# Allegro board 14109-MN34220_LV_REFB VER_A.brd
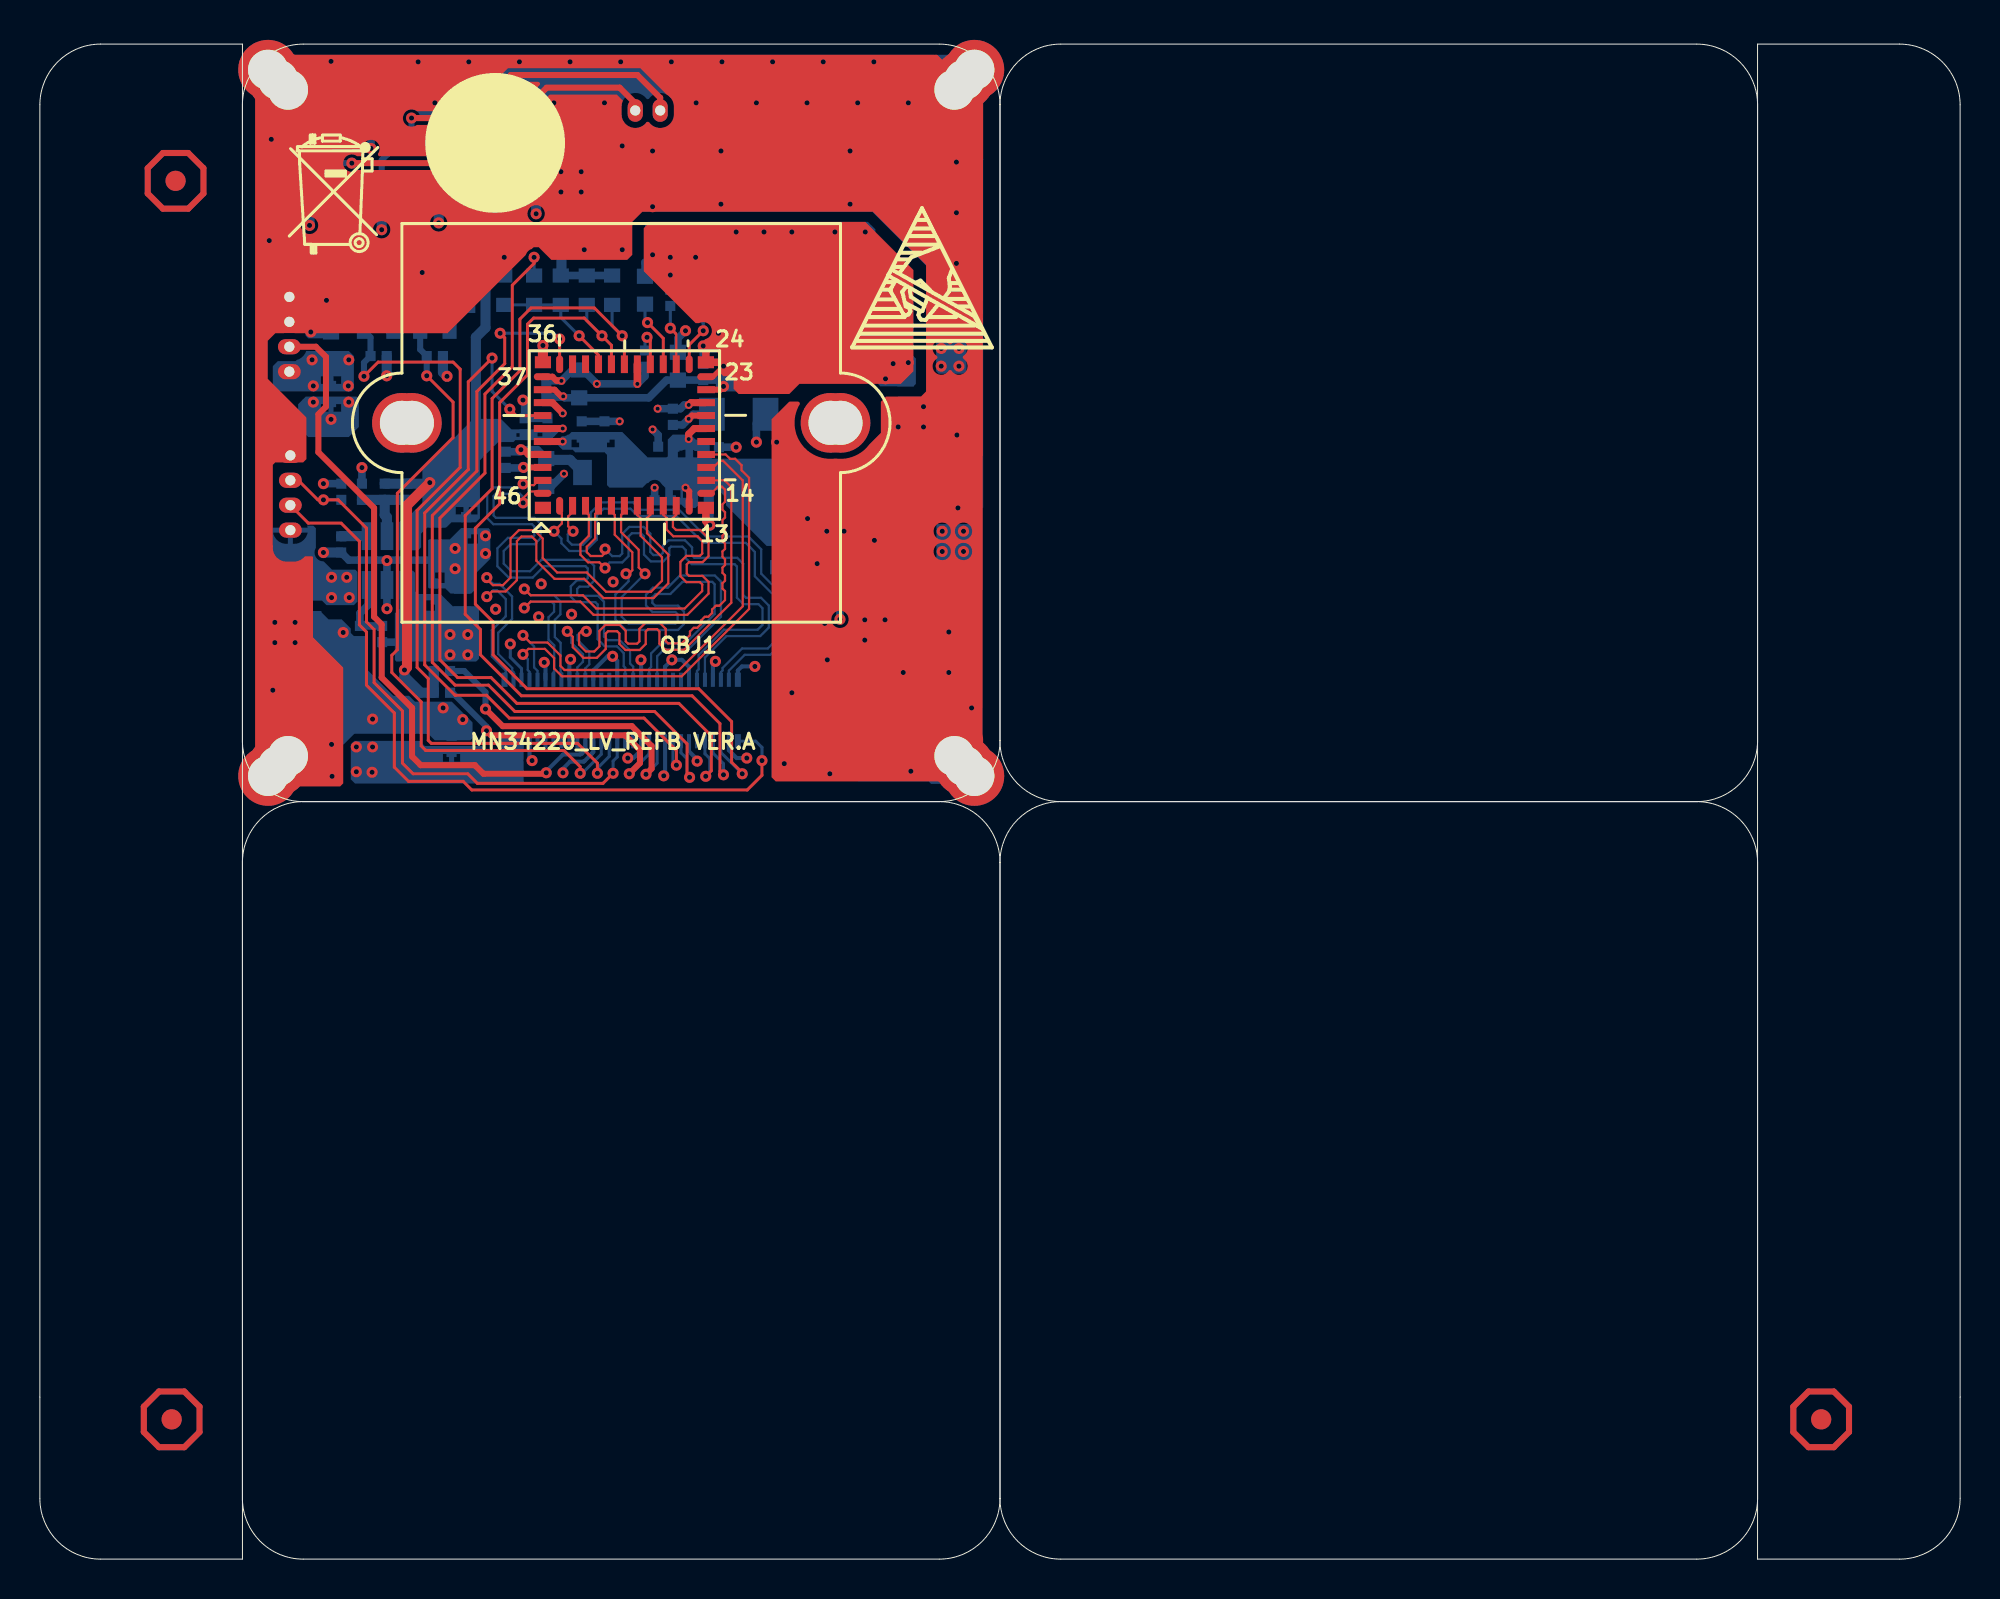
[diagram p0: board, top side]
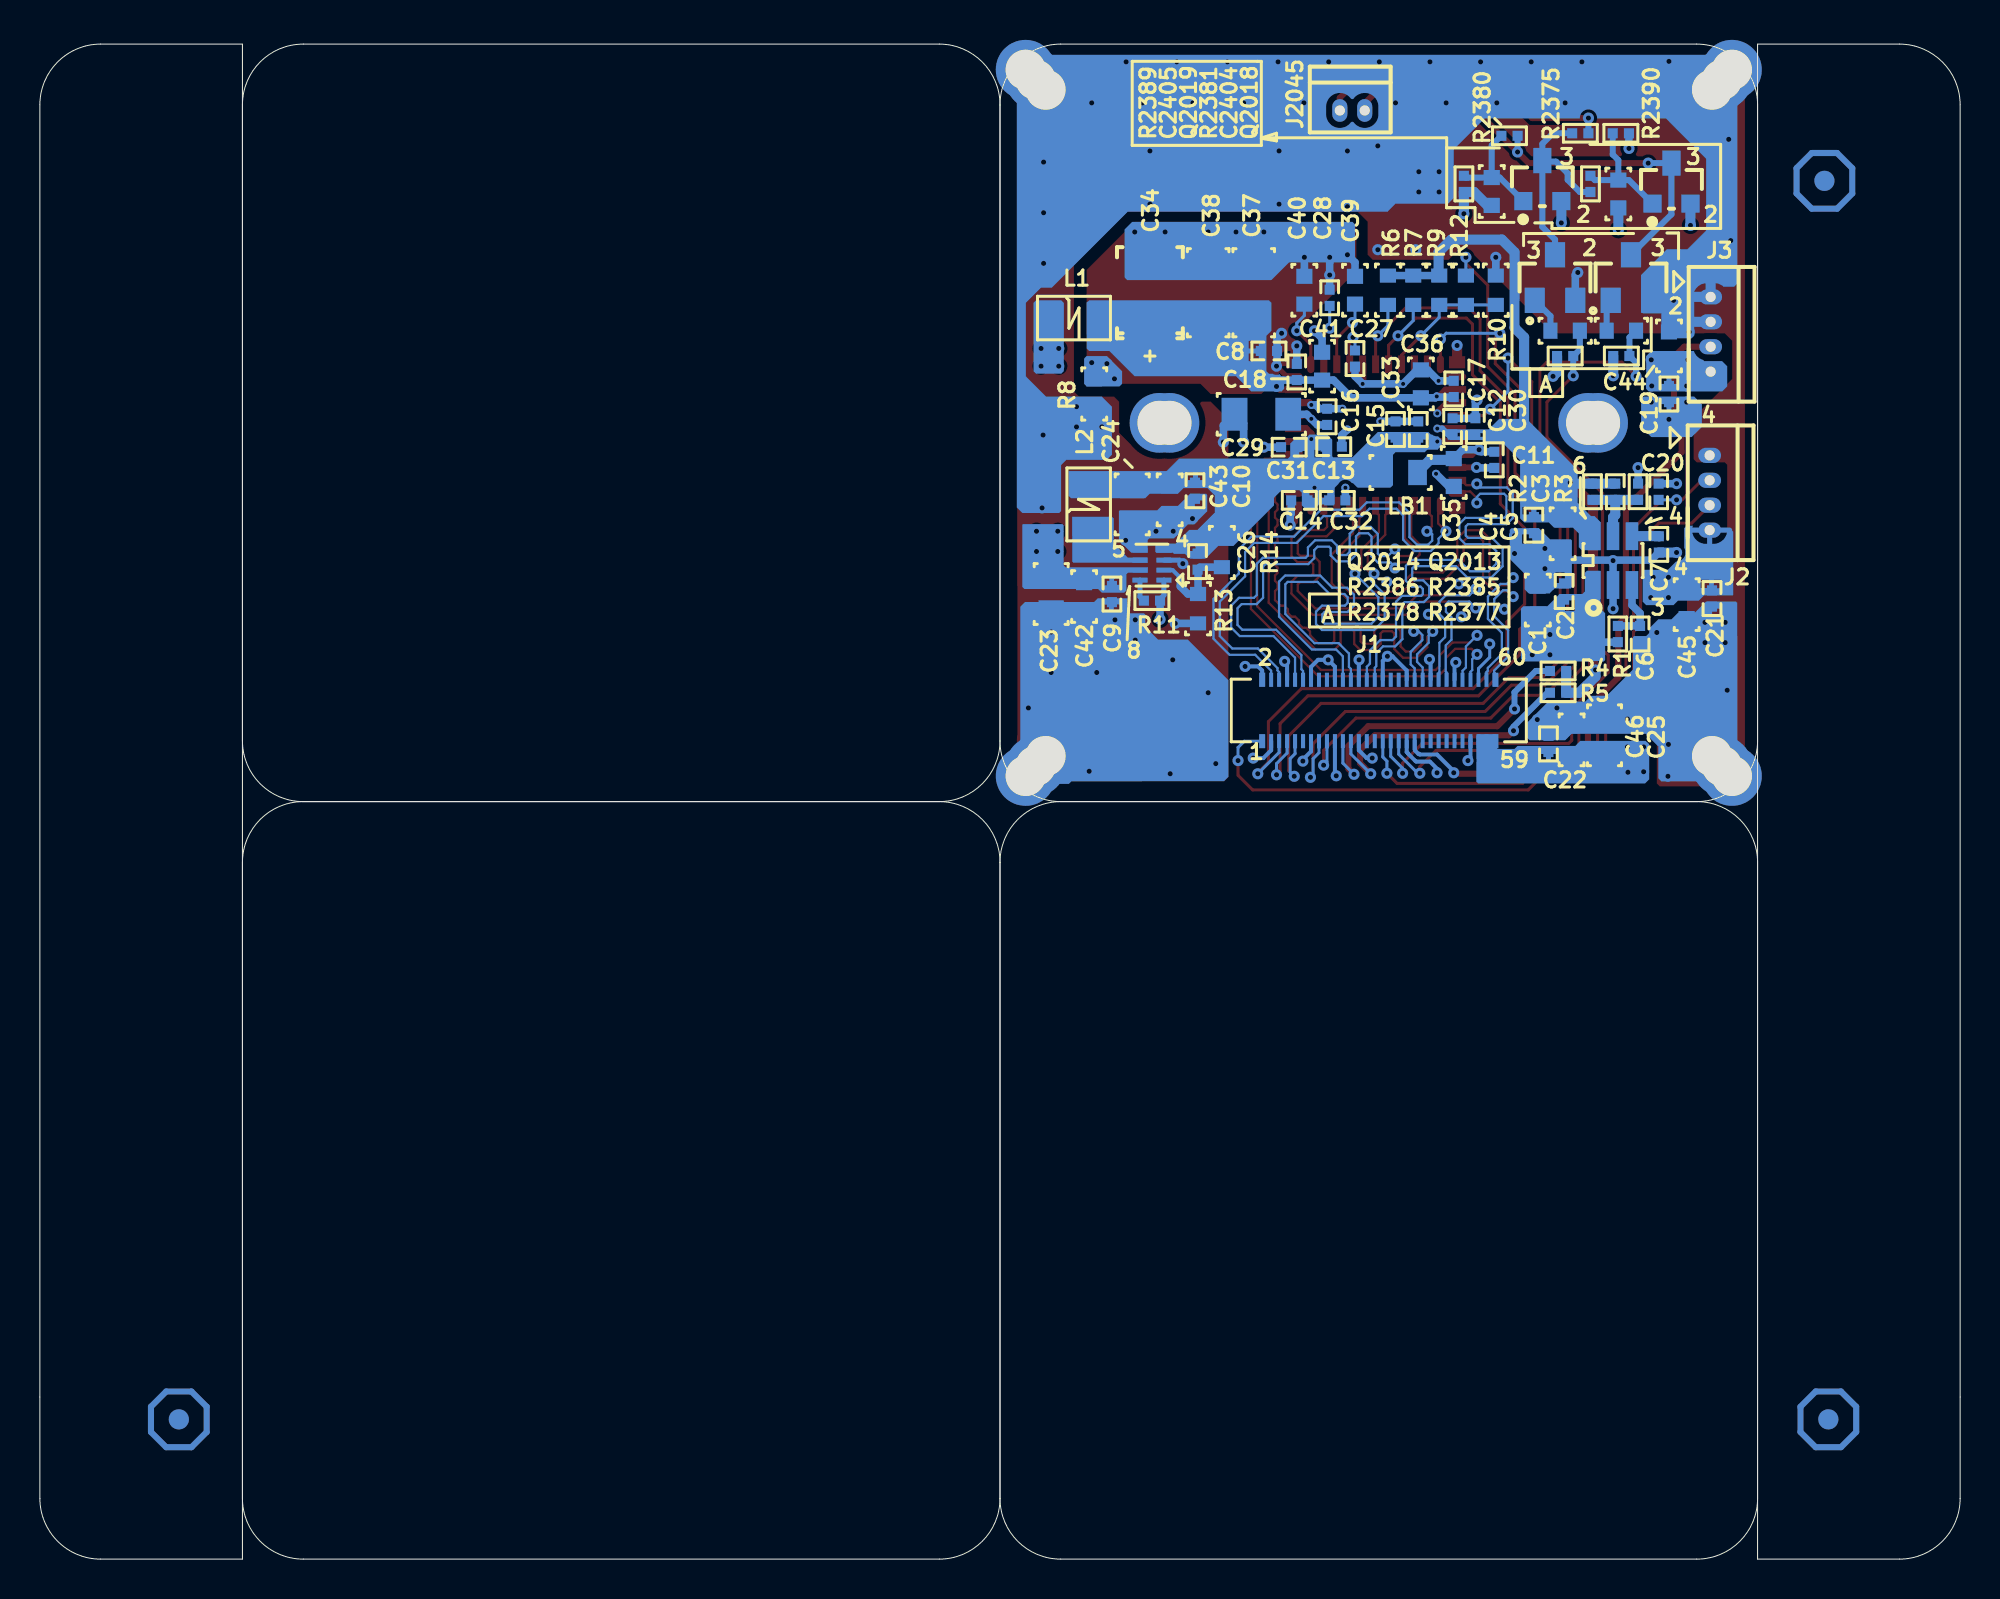
[diagram p1: board, bottom side, seen from below]

Outline 96.32 x 76 mm; copper layers: TOP, GND02, POWER03, BOTTOM. Coordinates in mm from the lower left corner of the outline.
Outline path: 13.21,38 arc(11.05,37.11) 10.16,34.95 10.16,3.05 arc(11.05,0.89) 13.21,0 45.11,0 arc(47.27,0.89) 48.16,3.05 ; 13.21,38 arc(11.05,38.89) 10.16,41.05 10.16,72.95 arc(11.05,75.11) 13.21,76 45.11,76 arc(47.27,75.11) 48.16,72.95 ; 13.21,38 45.11,38 ; 13.21,38 45.11,38 ; 45.11,38 arc(47.27,37.11) 48.16,34.95 ; 45.11,38 arc(47.27,38.89) 48.16,41.05 ; 48.16,72.95 48.16,41.05 ; 48.16,72.95 arc(49.05,75.11) 51.21,76 83.11,76 arc(85.27,75.11) 86.16,72.95 86.16,41.05 arc(85.27,38.89) 83.11,38 ; 48.16,72.95 48.16,41.05 ; 48.16,34.95 48.16,3.05 ; 48.16,34.95 arc(49.05,37.11) 51.21,38 ; 48.16,34.95 48.16,3.05 ; 48.16,41.05 arc(49.05,38.89) 51.21,38 ; 48.16,3.05 arc(49.05,0.89) 51.21,0 83.11,0 arc(85.27,0.89) 86.16,3.05 86.16,34.95 arc(85.27,37.11) 83.11,38 ; 51.21,38 83.11,38 ; 51.21,38 83.11,38 ; 0,72.95 arc(0.89,75.11) 3.05,76 10.16,76 10.16,0 3.05,0 arc(0.89,0.89) 0,3.05 0,72.95 ; 86.16,76 93.27,76 arc(95.43,75.11) 96.32,72.95 96.32,3.05 arc(95.43,0.89) 93.27,0 86.16,0 86.16,76

## Design rules (mm)
net group DIFFPAIR0: nets SENSOR_SDODA1M SENSOR_SDODA1P
net group DIFFPAIR1: nets SENSOR_SDODA0M SENSOR_SDODA0P
net group DIFFPAIR2: nets SENSOR_SDOCAM SENSOR_SDOCAP
net group DIFFPAIR3: nets SENSOR_SDODB0M SENSOR_SDODB0P
net group DIFFPAIR4: nets SENSOR_SDODB1M SENSOR_SDODB1P
net group DIFFPAIR5: nets SENSOR_SDODB2M SENSOR_SDODB2P
net group DIFFPAIR6: nets SENSOR_SDODCBM SENSOR_SDODCBP
net group DIFFPAIR7: nets SENSOR_SDODA2M SENSOR_SDODA2P

## Placement (name value [footprint] x y rotation side)
C1  -  [SC0603]  21.18 48.11 90 bottom
C2  -  [SC0402]  19.86 48.54 90 bottom
C3  -  [SC0402]  17.3 53.54 270 bottom
C4  -  [SC0402]  21.38 51.87 270 bottom
C5  -  [SC0603]  19.94 51.44 270 bottom
C6  -  [SC0402]  16.05 46.41 270 bottom
C7  -  [SC0402]  15.11 50.9 270 bottom
C8  -  [SC0402]  34.67 60.61 180 bottom
C9  -  [SC0402]  42.55 48.41 270 bottom
C10  -  [SC0402]  38.38 53.6 270 bottom
C11  -  [SC0402]  23.37 55.14 270 bottom
C12  -  [SC0402]  25.46 56.82 90 bottom
C13  -  [SC0402]  31.42 55.81 180 bottom
C14  -  [SC0402]  33.15 53.11 0 bottom
C15  -  [SC0402]  28.32 56.67 90 bottom
C16  -  [SC0402]  31.75 57.3 90 bottom
C17  -  [SC0402]  25.4 58.7 90 bottom
C18  -  [SC0402]  33.27 59.55 90 bottom
C19  -  [SC0402]  14.61 58.45 270 bottom
C20  -  [SC0402]  15.12 53.54 90 bottom
C21  -  [SC0402]  12.45 48.19 270 bottom
C22  -  [SC0402]  20.65 40.9 90 bottom
C23  -  [SC0805]  45.59 48.41 270 bottom
C24  -  [SC0805]  41.53 52.91 270 bottom
C25  -  [SC0805]  17.84 41.33 90 bottom
C26  -  [SC0402]  38.25 50.04 270 bottom
C27  -  [SC0402]  30.35 60.22 270 bottom
C28  -  [SC0402]  31.62 63.27 90 bottom
C29  -  [SC1206]  35.05 57.43 0 bottom
C30  -  [SC0402]  24.32 56.82 90 bottom
C31  -  [SC0402]  33.66 55.78 0 bottom
C32  -  [SC0402]  31.24 53.11 180 bottom
C33  -  [SC0402]  27.18 56.67 90 bottom
C34  -  [STC3528]  40.64 63.53 90 bottom
C35  -  [SC0603]  25.4 54.51 270 bottom
C36  -  [SC0603]  27.05 58.95 90 bottom
C37  -  [SC1206]  35.43 63.53 90 bottom
C38  -  [SC1206]  37.72 63.53 90 bottom
C39  -  [SC0603]  30.35 63.65 90 bottom
C40  -  [SC0603]  32.89 63.65 90 bottom
C41  -  [SC0603]  32 59.84 90 bottom
C42  -  [SC0603]  43.94 48.29 270 bottom
C43  -  [SC0603]  39.65 53.14 270 bottom
C44  -  [SC0603]  14.61 60.86 90 bottom
C45  -  [SC0603]  13.72 47.88 270 bottom
C46  -  [SC0603]  19.49 41.1 90 bottom
C2404  -  [SC0603]  17.14 68.48 90 bottom
C2405  -  [SC0603]  23.5 68.61 90 bottom
J1  -  [SED60-16F-A]  29.16 42.57 180 bottom
J2  -  [WBC0104-49T]  12.56 55.37 270 bottom
J3  -  [WBC0104-49T]  12.51 63.32 270 bottom
J2045  -  [SIP-2P-20]  31.11 72.67 180 bottom
L1  -  [HSL1007]  44.45 62.26 180 bottom
L2  -  [HSL1007]  43.71 52.91 90 bottom
LB1  -  [SL0805]  28.07 54.51 0 bottom
M1  -  [HOLE_3]  11.45 39.29 90 top
M2  -  [HOLE_3]  46.87 39.29 180 top
M3  -  [HOLE_3]  46.87 74.71 270 top
M4  -  [HOLE_3]  11.45 74.71 0 top
NOREF  -  [unnamed]  6.61 7.01 270 top
NOREF#2  -  [#2]  0 72.95 0 top
NOREF#3  -  [#2]  17.27 68.59 0 top
NOREF#4  -  [#2]  142.43 104.27 0 top
NOREF#5  -  [unnamed]  6.81 69.14 270 top
NOREF#6  -  [#2]  -173.94 -125.63 0 top
NOREF#7  -  [#2]  27.91 71.02 0 top
NOREF#8  -  [#2]  10.16 72.95 0 top
NOREF#9  -  [#2]  147.78 92.94 0 top
NOREF#10  -  [#2]  0 72.95 0 top
NOREF#11  -  [#2]  13.21 38 90 top
NOREF#12  -  [#2]  41.5 143.11 0 top
NOREF#13  -  [#2]  194.61 149.83 0 top
NOREF#14  -  [#2]  43.56 63.78 0 top
NOREF#15  -  [unnamed]  89.35 7.01 270 top
NOREF#16  -  [#2]  3.05 0 90 top
NOREF#17  -  [unnamed]  6.81 69.14 90 bottom
NOREF#18  -  [unnamed]  89.35 7.01 90 bottom
NOREF#19  -  [unnamed]  6.61 7.01 90 bottom
OBJ1  -  [LENS_SOCKET]  29.16 57 0 top
Q2013  -  [SOT23]  16.51 64.29 180 bottom
Q2014  -  [SOT23]  20.32 64.29 180 bottom
Q2018  -  [HSOT23]  14.48 68.99 180 bottom
Q2019  -  [HSOT23]  20.96 69.11 180 bottom
R1  -  [SR0402]  17.17 46.41 90 bottom
R2  -  [SR0402]  18.44 53.54 270 bottom
R3  -  [SR0402]  16.15 53.54 90 bottom
R4  -  [SR0402]  20.17 44.55 180 bottom
R5  -  [SR0402]  20.17 43.46 180 bottom
R6  -  [SR0603]  28.7 63.65 270 bottom
R7  -  [SR0603]  27.43 63.65 270 bottom
R8  -  [SR0603]  43.43 58.45 90 bottom
R9  -  [SR0603]  26.13 63.65 270 bottom
R10  -  [SR0603]  23.29 63.65 90 bottom
R11  -  [SR0402]  40.54 48.08 0 bottom
R12  -  [SR0603]  24.79 63.65 90 bottom
R13  -  [SR0603]  38.23 47.68 270 bottom
R14  -  [SR0603]  37.03 50.5 270 bottom
R2375  -  [SR0402]  19.05 71.53 180 bottom
R2377  -  [SR0402]  16.99 60.35 0 bottom
R2378  -  [SR0402]  19.81 60.35 0 bottom
R2380  -  [SR0402]  22.61 71.4 180 bottom
R2381  -  [SR0402]  18.54 68.99 270 bottom
R2385  -  [SR0603]  16.99 61.62 0 bottom
R2386  -  [SR0603]  19.81 61.62 0 bottom
R2389  -  [SR0402]  24.89 68.99 90 bottom
R2390  -  [SR0402]  17.02 71.53 0 bottom
U1  -  [SOT23-6B]  17.41 50.09 180 bottom
U2  -  [WQFN46-065-9_4X8_3MM]  29.32 56.39 0 top
U3  VALUE  [QFN8-050-02015L]  40.54 49.86 90 bottom

## Library data of the parts
C1 C5 C35 C36 C39-C46 C2404 C2405 = SC0603
C2-C4 C6-C22 C26-C28 C30-C33 = SC0402
C23-C25 = SC0805
C29 C37 C38 = SC1206
C34 = STC3528
J1 = SED60-16F-A
J2 J3 = WBC0104-49T
J2045 = SIP-2P-20
L1 L2 = HSL1007
LB1 = SL0805
M1-M4 = HOLE_3
OBJ1 = LENS_SOCKET
Q2013 Q2014 = SOT23
Q2018 Q2019 = HSOT23
R1-R5 R11 R2375 R2377 R2378 R2380 R2381 R2389 R2390 = SR0402
R6-R10 R12-R14 R2385 R2386 = SR0603
U1 = SOT23-6B
U2 = WQFN46-065-9_4X8_3MM
U3 = QFN8-050-02015L

## Footprints (pads in the part's own frame, mm; a bottom-side part is the same pattern mirrored in y, then rotated)
HOLE_3
  round 2.997 hole 2.007: 1(0,0) 2(0.5,-0.5) 3(1,-1)
HSL1007
  rect 0.914x1.626 smd: 1(-1.1,0) 2(1.1,0)
HSOT23
  rect 0.914x0.914 smd: 1(-0.953,-0.991) 2(0.953,-0.991)
  rect 0.914x1.27 smd: 3(0,1.041)
LENS_SOCKET
  round 2.997 hole 2.21: 1(11,0) 2(-11,0) 3(10.5,0) 4(-10.5,0)
QFN8-050-02015L
  rect 0.254x0.762 smd: 1(-0.75,-0.6) 2(-0.25,-0.6) 3(0.25,-0.6) 4(0.75,-0.6) 5(0.75,0.6) 6(0.25,0.6) 7(-0.25,0.6) 8(-0.75,0.6)
SC0402
  rect 0.508x0.508 smd: 1(-0.406,0) 2(0.406,0)
SC0603
  rect 0.762x0.813 smd: 1(-0.699,0) 2(0.699,0)
SC0805
  rect 0.991x1.27 smd: 1(-0.813,0) 2(0.813,0)
SC1206
  rect 1.295x1.651 smd: 1(-1.346,0) 2(1.346,0)
SED60-16F-A
  rect 0.305x0.711 smd: 1(-5.851,-1.54) 2(-5.851,1.54) 59(5.851,-1.54) 60(5.851,1.54)
  rect 0.203x0.711 smd: 3(-5.4,-1.54) 4(-5.4,1.54) 5(-5,-1.54) 6(-5,1.54) 7(-4.6,-1.54) 8(-4.6,1.54) 9(-4.2,-1.54) 10(-4.2,1.54) 11(-3.8,-1.54) 12(-3.8,1.54) 13(-3.4,-1.54) 14(-3.4,1.54) 15(-3,-1.54) 16(-3,1.54) 17(-2.6,-1.54) 18(-2.6,1.54) 19(-2.2,-1.54) 20(-2.2,1.54) 21(-1.8,-1.54) 22(-1.8,1.54) 23(-1.4,-1.54) 24(-1.4,1.54) 25(-1,-1.54) 26(-1,1.54) 27(-0.6,-1.54) 28(-0.6,1.54) 29(-0.2,-1.54) 30(-0.2,1.54) 31(0.2,-1.54) 32(0.2,1.54) 33(0.6,-1.54) 34(0.6,1.54) 35(1,-1.54) 36(1,1.54) 37(1.4,-1.54) 38(1.4,1.54) 39(1.8,-1.54) 40(1.8,1.54) 41(2.2,-1.54) 42(2.2,1.54) 43(2.6,-1.54) 44(2.6,1.54) 45(3,-1.54) 46(3,1.54) 47(3.4,-1.54) 48(3.4,1.54) 49(3.8,-1.54) 50(3.8,1.54) 51(4.2,-1.54) 52(4.2,1.54) 53(4.6,-1.54) 54(4.6,1.54) 55(5,-1.54) 56(5,1.54) 57(5.4,-1.54) 58(5.4,1.54)
SIP-2P-20
  oval 0.762x1.143 hole 0.508: 1(0,0) 2(1.25,0)
SL0805
  rect 0.94x1.27 smd: 1(-0.851,0) 2(0.851,0)
SOT23
  rect 1.016x1.27 smd: 1(-1.016,-1.143) 2(1.016,-1.143) 3(0,1.143)
SOT23-6B
  rect 0.635x1.397 smd: 1(-0.95,-1.225) 2(0,-1.225) 3(0.95,-1.225) 4(0.95,1.225) 5(0,1.225) 6(-0.95,1.225)
SR0402
  rect 0.508x0.508 smd: 1(-0.406,0) 2(0.406,0)
SR0603
  rect 0.711x0.813 smd: 1(-0.737,0) 2(0.737,0)
STC3528
  rect 1.727x2.286 smd: 1(-1.499,0) 2(1.499,0)
unnamed
  round 1.016 smd: 1(0,0)
WBC0104-49T
  oval 0.762x1.143 hole 0.508: 1(0,0) 2(1.25,0) 3(2.5,0) 4(3.75,0)
WQFN46-065-9_4X8_3MM
  rect 0.813x0.61 smd: 1(-4.088,-3.65) 13(4.088,-3.65) 24(4.088,3.65) 36(-4.088,3.65)
  oval 0.356x0.889 smd: 2(-3.25,-3.55) 12(3.25,-3.55) 25(3.25,3.55) 35(-3.25,3.55)
  rect 0.356x0.889 smd: 3(-2.6,-3.55) 4(-1.95,-3.55) 5(-1.3,-3.55) 6(-0.65,-3.55) 7(0,-3.55) 8(0.65,-3.55) 9(1.3,-3.55) 10(1.95,-3.55) 11(2.6,-3.55) 26(2.6,3.55) 27(1.95,3.55) 28(1.3,3.55) 29(0.65,3.55) 30(0,3.55) 31(-0.65,3.55) 32(-1.3,3.55) 33(-1.95,3.55) 34(-2.6,3.55)
  oval 0.889x0.356 smd: 14(4.1,-2.925) 23(4.1,2.925) 37(-4.1,2.925) 46(-4.1,-2.925)
  rect 0.889x0.356 smd: 15(4.1,-2.275) 16(4.1,-1.625) 17(4.1,-0.975) 18(4.1,-0.325) 19(4.1,0.325) 20(4.1,0.975) 21(4.1,1.625) 22(4.1,2.275) 38(-4.1,2.275) 39(-4.1,1.625) 40(-4.1,0.975) 41(-4.1,0.325) 42(-4.1,-0.325) 43(-4.1,-0.975) 44(-4.1,-1.625) 45(-4.1,-2.275)

## Nets
3V3: C1.1 C2.1 C9.1 C16.1 C19.1 C21.1 C22.1 C23.1 C25.1 C29.1 C42.1 C44.1 C45.1 C46.1 C2404.1 C2405.1 J1.55 J1.57 J1.59 J2.4 J3.4 L1.1 Q2018.2 Q2019.2 R1.1 R11.1 R2389.1 R2390.1 U1.1 U2.20 U3.1 U3.7
AGND: C8.2 C17.2 C18.2 C27.2 C28.2 C34.2 C36.2 C37.2 C38.2 C39.2 C40.2 C41.2 R8.2 U2.23 U2.24 U2.29 U2.37
GND: C1.2 C2.2 C4.2 C5.2 C6.2 C7.2 C9.2 C10.2 C11.2 C12.2 C13.2 C14.2 C15.2 C16.2 C19.2 C20.2 C21.2 C22.2 C23.2 C24.2 C25.2 C29.2 C30.2 C31.2 C32.2 C33.2 C35.2 C42.2 C43.2 C44.2 C45.2 C46.2 J1.2 J1.3 J1.8 J1.13 J1.14 J1.19 J1.20 J1.25 J1.26 J1.32 J1.37 J1.38 J1.44 J1.50 J1.53 J1.56 J2.1 J3.1 J3.2 M1.1 M1.2 M1.3 M2.1 M2.2 M2.3 M3.1 M3.2 M3.3 M4.1 M4.2 M4.3 Q2013.2 Q2014.2 R3.2 R8.1 R10.2 R13.2 R2377.2 R2378.2 U1.2 U2.13 U2.21 U2.36 U2.39 U2.44 U3.3 U3.5
+1_2V_VDD12: C10.1 C13.1 C14.1 C15.1 C24.1 C26.1 C31.1 C32.1 C33.1 C43.1 L2.2 LB1.2 R14.1 U2.12 U2.19 U2.42 U3.4
+1_2V_VDD12L: C11.1 C35.1 LB1.1 U2.43
+1_8V_VDD18: C3.1 C4.1 C5.1 C12.1 C30.1 R2.1 R4.2 R5.2 R6.1 R7.1 R9.1 U1.6 U2.41
+3_3V_AVDD: C8.1 C17.1 C18.1 C34.1 C36.1 C37.1 C38.1 C41.1 L1.2 U2.22 U2.38
DRV0: J2045.1 R2375.2
DRV1: J2045.2 Q2013.3 Q2018.3 R2380.2
FLASH_TRIG: J1.27
GPIO1: J1.41
GPIO2: J1.43
GPIO3: J1.45
GPIO4: J1.47
GPIO5: J1.49
GPIO6: J1.51
IR-LED-CONTROL: C20.1 J1.31 J2.2
IRCUT-CONTROL1: J1.33 R2377.1 R2385.1
IRCUT-CONTROL2: J1.35 R2378.1 R2386.1
LIGHT-RESISTOR: J1.1 J2.3
PWM: J1.39 J3.3
SENSOR_CLK: J1.17 U2.40
SENSOR_RESET: J1.15 U2.35
SENSOR_SDOCAM: J1.22 U2.7
SENSOR_SDOCAP: J1.24 U2.6
SENSOR_SDODA0M: J1.10 U2.5
SENSOR_SDODA0P: J1.12 U2.4
SENSOR_SDODA1M: J1.4 U2.3
SENSOR_SDODA1P: J1.6 U2.2
SENSOR_SDODA2M: J1.28 U2.46
SENSOR_SDODA2P: J1.30 U2.45
SENSOR_SDODB0M: J1.54 U2.17
SENSOR_SDODB0P: J1.52 U2.16
SENSOR_SDODB1M: J1.42 U2.15
SENSOR_SDODB1P: J1.40 U2.14
SENSOR_SDODB2M: J1.60 U2.9
SENSOR_SDODB2P: J1.58 U2.8
SENSOR_SDODCBM: J1.48 U2.11
SENSOR_SDODCBP: J1.46 U2.10
SHUTTER_TRIG: J1.29
SPI0_CLK_I2C0_CLK: J1.5 R7.2 U2.31
SPI0_CS: J1.9 R12.2
SPI0_MOSI_I2C0_DAT: J1.7 R6.2 U2.30
VI_POWER1: J1.21 R4.1
VI_POWER2: J1.23 R5.1
$4N2: C3.2 R2.2 R3.1 U1.5
$4N4: C7.1 U1.4
$4N17: C6.1 R1.2 U1.3
$4N179: R11.2 U3.8
$4N187: L2.1 U3.6
$4N192: C26.2 R13.1 R14.2 U3.2
$5N29: R9.2 R10.1 R12.1 U2.32
$5N128: C39.1 U2.27
$5N130: C40.1 U2.25
$5N132: C28.1 U2.26
$5N134: C27.1 U2.28
$7N8: C2404.2 Q2018.1 R2381.1 R2390.2
$7N9: C2405.2 Q2019.1 R2380.1 R2389.2
$7N33: Q2014.3 Q2019.3 R2375.1 R2381.2
$7N37: Q2013.1 R2385.2
$7N49: Q2014.1 R2386.2

Pads without a net: J1 11 16 18 34 36; NOREF 1; NOREF#5 1; NOREF#15 1; NOREF#17 1; NOREF#18 1; NOREF#19 1; OBJ1 1 2 3 4; U2 1 18 33 34

## Via types
v1: diameter 0.559, hole 0.254, TOP to BOTTOM, 214 vias
v2: diameter 0.406, hole 0.203, TOP to BOTTOM, 16 vias

## Routing (per net, layer and track width the routed paths; a pad name or vN(x,y) marks a point on that pad's centre or on a via; arc(x,y) is an arc through that point)
3V3: length 18.9
  TOP w0.305: U2.20 32.71,57.36 v2(32.55,57.2)
  POWER03 w0.508: 12.51,58.83 J3.4 13.44,59.57 ; 13.49,51.62 J2.4 12.56,50.88
  BOTTOM w0.254: R11.1 40.13,48.16 39.94,48.35 U3.1 ; J2.4 13.57,51.62 ; J2.4 11.56,51.62 ; J2.4 12.56,50.81
  BOTTOM w0.381: C16.1 32.24,56.9 v2(32.55,57.2) 32.77,57.43 C29.1 ; 17.17,46 17.96,46 ; R11.1 v1(40.13,47.14) ; R2390.1 v1(16.61,70.77)
  BOTTOM w0.508: Q2019.2 v1(20,67.03) ; C2405.1 23.71,67.91 24.38,68.58 R2389.1 v1(24.89,67.49) ; C2404.1 v1(17.14,66.69) ; Q2018.2 v1(13.53,66.91)
  vias: v1(13.65,60.16) v1(13.72,58.85) v1(14.63,49.25) v1(14.63,48.24) v1(15.39,49.25) v1(15.49,60.16) v1(15.47,58.85) v1(15.52,48.24) v1(15.88,40.74) v1(15.88,39.5) v1(16.69,40.74) v1(16.66,39.47) v1(20.57,46.38) v1(20.57,45.37) v1(21.46,46.38) v1(21.46,45.37) v1(45.21,60.73) v1(45.21,59.84) v1(45.26,51.56) v1(45.26,50.55) v1(46.1,60.73) v1(46.1,59.84) v1(46.33,51.56) v1(46.33,50.55)
AGND: length 18.8
  TOP w0.254: U2.23 33.76,59.31 v1(34.29,59.84)
  TOP w0.305: v2(26.16,59.11) 26.02,59.11 26.01,59.12 25.9,59.12 25.71,59.31 U2.37
  TOP w0.381: v1(34.29,59.84) 34.09,60.04 U2.24 33.41,60.73 v1(33.27,60.86) ; v2(29.97,58.95) U2.29
  BOTTOM w0.381: C17.2 v2(26.16,59.11) 26.71,59.65 C36.2 27.24,59.65 v2(27.94,58.95) v2(29.97,58.95) 30.35,59.34 C27.2 ; v1(34.29,59.84) 34.26,59.87 C8.2 34.26,61.27 v1(34.04,61.49) ; v1(32.39,61.62) 32,61.24 C41.2 ; v1(30.73,65.43) 30.35,65.05 C39.2 ; v1(31.62,65.3) v1(31.62,64.42) C28.2 ; C18.2 v1(33.27,60.86) ; C40.2 v1(32.89,65.3)
  vias: v1(34.92,66.57) v1(36.32,66.57) v1(37.72,66.57) v1(39.88,66.57) v1(41.4,66.57) v1(42.42,59.21) v1(42.8,59.97) v1(43.56,60.02)
GND: length 95.2
  TOP w0.305: v1(24.26,54.76) 24.26,54.76 U2.44
  TOP w0.356: v2(32.55,57.9) 32.66,58.01 U2.21 ; U2.39 25.71,58.01 26.23,57.49 v2(26.23,57.48)
  TOP w0.381: v1(33.6,51.87) 33.41,52.06 U2.13
  TOP w0.508: U2.36 v1(25.23,60.88)
  GND02 w0.508: J3.2 13.55,62.07
  GND02 w0.533: 44.02,40.29 M2.3 45.87,42.14 ; 11.59,62.07 J3.2 ; 14.3,73.71 M4.3 12.45,71.86 ; 45.87,71.86 M3.3 44.02,73.71 ; J3.1 12.51,64.06 ; J3.1 13.44,63.32 ; J3.1 11.59,63.32 ; 12.45,42.14 M1.3 14.3,40.29 ; J2.1 12.56,56.11 ; J2.1 11.64,55.37 ; J2.1 13.49,55.37
  BOTTOM w0.152: J1.56 24.16,44.68 23.6,45.24 v1(23.6,45.91)
  BOTTOM w0.203: J1.32 28.96,45.06 v1(28.73,45.29) 28.47,45.29 27.76,44.58 J1.38 ; v1(30.15,45.11) 30.16,45.1 J1.26 ; v1(32.97,40.03) 32.97,40.11 32.56,40.52 J1.13 ; v1(26.62,45.14) 26.56,45.08 J1.44 ; J1.19 31.36,39.36 v1(31.29,39.3) ; v1(29.49,40.18) 29.77,40.18 30.16,40.58 J1.25 ; J1.50 25.36,44.92 v1(25.3,44.98) ; J1.8 33.76,44.91 v1(33.88,45.04) ; 24.56,41.22 J1.53 24.56,40.24 24.69,40.11 v1(24.69,40.06) ; J1.14 32.56,44.76 32.21,45.11 v1(31.7,45.11) 31.36,44.77 J1.20 ; J1.2 35.01,44.58 35.21,44.78 v1(35.86,44.78) ; J1.3 34.56,40.57 34.95,40.18 v1(35.46,40.18) ; v1(26.24,39.45) 26.24,39.65 26.59,40.01 27.28,40.01 27.31,40.04 27.32,40.04 27.7,40.41 27.7,40.42 27.76,40.49 J1.37
  BOTTOM w0.254: v1(38.99,49.94) 39.16,50.11 U3.3
  BOTTOM w0.305: C22.2 20.62,41.3 19.99,41.3 C46.2
  BOTTOM w0.381: v1(14.63,40.87) 14.81,40.87 16.08,42.14 v1(16.69,42.14) 16.81,42.14 16.82,42.14 C25.2 19.15,42.14 C46.2 19.49,42.32 19.87,42.7 v1(20.23,42.7) ; C14.2 33.55,52.45 33.6,52.4 v1(33.6,51.87) ; v1(19.18,64.54) 19.3,64.42 Q2014.2 ; v1(24.23,58.14) 24.32,58.06 C30.2 C12.2 ; v2(26.29,54.45) 25.65,53.81 C35.2 ; v2(32.55,57.9) 32.32,57.9 32.13,57.71 C16.2 v2(30.99,57.71) ; v2(29.08,57.08) C15.2 C33.2 ; 19.76,50.09 19.74,50.12 17.43,50.12 v1(17.41,50.09) ; 16.05,46 15.7,46 v1(15.21,46.48) ; v1(35.94,56.03) 35.94,56.97 C29.2 36.96,56.87 v1(36.96,56.03) ; R3.2 v1(16.15,54.76) ; v2(30.73,56.67) 31.01,56.39 C13.2 ; C7.2 15.49,50.12 17.38,50.12 v1(17.41,50.09) ; v1(17.41,50.09) U1.2 v1(17.41,47.68) ; C32.2 v2(30.84,53.75) ; C22.2 20.65,41.73 21.03,42.11 v1(21.21,42.11) ; v1(39.37,46.94) R13.2 ; C11.2 24.23,54.74 v1(24.26,54.76) ; C20.2 v1(14.22,53.95) ; C31.2 v1(34.92,55.78) ; R10.2 v1(23.29,65.3)
  BOTTOM w0.508: 12.51,64.13 J3.1 13.52,63.32 ; J3.2 13.52,62.07 ; v1(20.42,59.34) 20.22,59.54 R2378.2 ; R2377.2 v1(17.4,59.36) ; C7.2 v1(14.22,50.5) ; Q2013.2 v1(14.38,63.15)
  vias: v1(11.51,66.14) v1(11.61,71.22) v1(11.68,43.59) v1(11.79,46.99) v1(11.79,45.98) v1(12.8,46.99) v1(12.8,45.98) v1(13.59,61.56) v1(13.72,58.04) v1(14.61,75.13) v1(14.61,57.18) v1(14.66,39.27) v1(15.49,58.04) v1(18.97,75.11) v1(19.81,73.05) v1(20.83,50.7) v1(20.83,49.68) v1(21.51,75.11) v1(22.35,51.33) v1(22.35,50.45) v1(22.86,47.65) v1(23.24,73.05) v1(24.05,75.11) v1(25.02,47.27) v1(25.15,48.92) v1(25.78,73.05) v1(26.14,69.6) v1(26.14,68.58) v1(26.59,75.11) v1(26.67,47.4) v1(27.15,69.6) v1(27.15,68.58) v1(27.3,65.69) v1(28.32,73.05) v1(28.75,49.02) v1(29.13,75.11) v1(29.21,70.89) v1(29.21,65.69) v1(30.73,70.64) v1(30.73,67.84) v1(31.67,75.11) v1(32.92,73.05) v1(34.16,70.64) v1(34.16,67.97) v1(34.21,75.11) v1(35.94,73.05) v1(36.75,75.11) v1(37.34,39.9) v1(37.72,43.46) v1(38.48,73.05) v1(38.51,52.2) v1(39.29,75.11) v1(39.47,51.56) v1(39.5,45.11) v1(39.62,39.4) v1(40.34,51.56) v1(40.64,70.64) v1(40.64,67.97) v1(41.02,73.05) v1(41.38,47.12) v1(41.38,46.1) v1(41.83,75.11) v1(41.86,51.11) v1(42.39,47.12) v1(43.05,56.8) v1(43.31,44.48) v1(43.56,73.05) v1(43.69,39.52) v1(44.32,57.81) v1(44.32,56.8) v1(45.59,46.51) v1(45.59,44.48) v1(45.97,70.08) v1(45.97,67.54) v1(45.97,65) v1(46,56.39) v1(46.05,52.73) v1(46.74,42.7)
+1_2V_VDD12: length 5
  TOP w0.305: U2.12 32.57,53.56 v2(32.39,53.75)
  TOP w0.356: U2.42 v2(26.23,56.06) ; v2(32.55,56.19) 32.55,56.43 32.82,56.71 U2.19
  BOTTOM w0.381: C31.1 32.93,55.78 32.55,56.16 v2(32.55,56.19) 32.16,55.81 C13.1
+1_2V_VDD12L: length 5.6
  TOP w0.356: U2.43 24.51,55.41 24.27,55.65 v1(24.13,55.65)
  BOTTOM w0.381: C35.1 24.96,55.65 v1(24.13,55.65) 24.03,55.55 C11.1
  BOTTOM w0.508: LB1.1 27.22,54.52 26.59,55.14 25.46,55.14 C35.1
+1_8V_VDD18: length 34.2
  TOP w0.356: U2.41 v2(26.23,56.71)
  TOP w0.508: v1(19.56,54) 18.41,52.86 18.41,44.73 v1(18.29,44.6)
  BOTTOM w0.305: C12.1 25.68,56.42 25.98,56.71 v2(26.23,56.71)
  BOTTOM w0.381: R6.1 R7.1 R9.1
  BOTTOM w0.508: 21.87,57 21.87,61.29 22.35,61.77 22.35,65.56 22.99,66.19 25.53,66.19 26.16,65.56 26.16,64.39 ; R4.2 R5.2 19.1,43.46 18.29,44.27 v1(18.29,44.6) ; C3.1 R2.1 19.51,53.95 v1(19.56,54)
+3_3V_AVDD: length 11.5
  TOP w0.305: v2(26.25,58.33) 26.15,58.33 25.82,58.66 U2.38 ; v1(34.29,58.83) 34.13,58.66 U2.22
  BOTTOM w0.381: v1(34.29,58.83) 33.97,59.15 C18.1 C41.1 31.43,59.15 30.54,58.26 C36.1 26.32,58.26 v2(26.25,58.33) 26.22,58.29 C17.1
DRV0: length 15.2
  TOP w0.305: J2045.1 31.11,73.31 29.97,74.45 23.62,74.45 21.46,72.29 v1(18.64,72.29)
  BOTTOM w0.305: R2375.2 v1(18.64,72.29)
DRV1: length 23.9
  TOP w0.305: J2045.2 29.87,73.03 29.08,73.81 25.43,73.81 v1(22.2,70.59) 21.64,70.03 v1(15.65,70.03)
  BOTTOM w0.305: R2380.2 v1(22.2,70.59) ; Q2013.3 14.48,67.46 Q2018.3 v1(15.65,70.03)
IR-LED-CONTROL: length 31.1
  TOP w0.152: J2.2 12.96,54.12 13.94,53.14 v1(14.22,53.14) 14.96,53.14 16.38,51.72 16.38,47.02 16.76,46.64 16.76,43.97 18.19,42.55 18.19,39.93 18.72,39.4 21.46,39.4 21.95,38.91 28.24,38.91 v1(28.75,39.42)
  BOTTOM w0.152: J1.31 28.96,40.24 28.75,40.03 v1(28.75,39.42) ; C20.1 v1(14.22,53.14)
IRCUT-CONTROL1: length 38.9
  TOP w0.152: v1(16.26,59.34) 16.97,60.05 20.73,60.05 21.08,59.69 21.08,54.76 18.92,52.6 18.92,44.73 19.48,44.17 19.48,41.07 19.63,40.92 26.97,40.92 27.97,39.93 v1(27.97,39.42)
  BOTTOM w0.152: J1.33 28.56,40.27 27.97,39.68 v1(27.97,39.42)
  BOTTOM w0.305: R2385.1 16.59,61.29 R2377.1 16.26,60.02 v1(16.26,59.34)
IRCUT-CONTROL2: length 34.2
  TOP w0.152: v1(19.41,59.36) 20.73,58.04 20.73,56.26 17.93,53.47 17.93,45.62 17.65,45.34 17.65,44.48 19.13,43 19.13,40.79 19.35,40.57 26.29,40.57 27.1,39.75 v1(27.1,39.42)
  BOTTOM w0.152: J1.35 28.16,40.38 27.2,39.42 v1(27.1,39.42)
  BOTTOM w0.305: R2386.1 19.08,60.68 R2378.1 v1(19.41,59.36)
LIGHT-RESISTOR: length 38.2
  TOP w0.152: v1(36.22,40.06) 36.22,39.32 35.48,38.58 21.67,38.58 21.23,39.02 18.49,39.02 17.78,39.73 17.78,42.44 16.38,43.84 16.38,46.51 16.03,46.86 16.03,51.06 15.11,51.97 13.46,51.97 J2.3
  BOTTOM w0.152: v1(36.22,40.06) 36.22,40.72 35.91,41.03 J1.1
PWM: length 34.2
  TOP w0.305: v1(25.4,39.45) 25.35,39.4 22.25,39.4 21.82,39.83 19.1,39.83 18.67,40.26 18.67,42.7 17.14,44.22 17.14,46.89 16.76,47.27 16.76,52.73 13.97,55.53 13.97,57.43 14.35,57.81 14.35,60.31 13.84,60.82 J3.3
  BOTTOM w0.203: v1(25.4,39.45) 25.4,39.52 26.24,40.36 27.1,40.36 27.14,40.4 27.18,40.4 27.34,40.56 27.34,40.6 27.36,40.62 J1.39
SENSOR_CLK: length 37.9
  TOP w0.152: U2.40 23.89,57.36 v1(23.57,57.68) ; v1(31.93,39.83) 31.93,40.57 30.3,42.19 23.55,42.19 22.4,43.33 20.83,43.33 19.3,44.86 19.3,52.48 21.49,54.66 21.49,59.06 v1(22.68,60.25)
  BOTTOM w0.152: v1(22.68,60.25) 22.68,58.57 v1(23.57,57.68) ; v1(31.93,39.83) 31.76,40 J1.17
SENSOR_RESET: length 40.7
  TOP w0.152: v1(26.07,61.21) U2.35 ; v1(32.59,39.22) 32.46,39.35 32.46,40.9 30.84,42.52 23.83,42.52 22.5,43.84 20.83,43.84 19.69,44.98 19.69,52.35 21.92,54.59 21.92,58.57 23.32,59.97 23.32,61.27 v1(23.09,61.49)
  BOTTOM w0.152: v1(26.07,61.21) 25.78,61.49 v1(23.09,61.49) ; J1.15 32.16,40.45 32.46,40.15 32.46,39.35 v1(32.59,39.22)
SENSOR_SDOCAM: length 23.5
  TOP w0.114: v1(30.35,49.43) 30.04,49.75 30.04,50.64 29.15,51.52 29.15,52.38 29.32,52.55 U2.7
  BOTTOM w0.114: J1.22 30.96,44.11 30.96,45.29 31.31,45.63 32.52,45.63 34.16,47.28 34.16,49.04 33.86,49.34 32.1,49.34 31.49,48.73 30.75,48.73 30.4,48.38 30.4,47.84 30.73,47.51 31.88,47.51 31.99,47.4 31.99,47.04 31.88,46.93 29.53,46.93 29.18,47.27 29.18,48.26 v1(30.35,49.43)
SENSOR_SDOCAP: length 23.5
  TOP w0.114: U2.6 28.67,52.55 28.84,52.38 28.84,51.39 29.72,50.5 29.72,49.61 29.54,49.43 v1(29.4,49.43)
  BOTTOM w0.114: v1(29.4,49.43) 29.53,49.3 29.53,49.05 28.87,48.39 28.87,47.14 29.4,46.61 32.01,46.61 32.31,46.91 32.31,47.53 32.01,47.83 30.86,47.83 30.72,47.97 30.72,48.25 30.88,48.41 31.62,48.41 32.23,49.02 33.73,49.02 33.85,48.9 33.85,47.41 32.39,45.95 31.17,45.95 30.66,45.43 30.66,44.76 30.56,44.66 J1.24
SENSOR_SDODA0M: length 23.6
  TOP w0.114: v1(28.35,50.67) 28.35,50.47 28.2,50.32 27.63,50.32 27.43,50.51 27.43,50.78 27.85,51.2 27.85,52.43 28.02,52.6 U2.5
  BOTTOM w0.114: v1(28.35,50.67) 28.7,50.32 29.08,50.32 29.21,50.45 29.21,51.43 29.56,51.78 30.28,51.78 30.62,51.44 30.62,50.52 30.77,50.37 31.14,50.37 31.25,50.48 31.25,50.84 31.52,51.11 32.36,51.11 32.72,50.75 32.72,50.34 32.83,50.23 34.98,50.23 35.28,49.93 35.28,48.36 35.42,48.22 36.17,48.22 36.56,47.83 36.56,46.73 36.14,46.31 34.44,46.31 33.36,45.22 J1.10
SENSOR_SDODA0P: length 23.5
  TOP w0.114: U2.4 27.37,52.55 27.54,52.38 27.54,51.33 27.11,50.91 27.11,50.38 27.49,50 28.06,50 v1(28.35,49.72)
  BOTTOM w0.114: v1(28.35,49.72) 28.32,49.75 28.57,50 29.21,50 29.53,50.31 29.53,51.3 29.69,51.46 30.15,51.46 30.3,51.31 30.3,50.39 30.64,50.05 31.27,50.05 31.57,50.35 31.57,50.71 31.65,50.79 32.23,50.79 32.4,50.62 32.4,50.21 32.7,49.91 34.85,49.91 34.96,49.8 34.96,48.23 35.29,47.91 36.04,47.91 36.25,47.7 36.25,46.86 36,46.62 34.31,46.62 33.04,45.35 33.04,44.64 32.96,44.55 J1.12
SENSOR_SDODA1M: length 23.5
  TOP w0.114: U2.3 26.72,52.53 26.5,52.31 26.5,51.82 26.49,51.82 v1(26.74,51.56)
  BOTTOM w0.114: v1(26.74,51.56) 26.63,51.56 26.48,51.41 26.48,51.09 26.68,50.89 27.24,50.89 27.62,51.27 27.62,52.49 28.14,53.01 29.76,53.01 30.13,52.64 32.06,52.64 33.41,51.3 35.54,51.3 36.18,50.65 36.18,49.43 37.45,48.16 37.45,46.17 36.64,45.37 35.36,45.37 34.56,44.57 J1.4
SENSOR_SDODA1P: length 23.5
  TOP w0.114: v1(25.79,51.56) 26.18,51.95 26.18,52.44 26.07,52.55 U2.2
  BOTTOM w0.114: v1(25.79,51.56) 26.16,51.19 26.16,50.96 26.55,50.57 27.37,50.57 27.94,51.14 27.94,52.36 28.27,52.69 29.63,52.69 30,52.33 31.93,52.33 33.27,50.98 35.41,50.98 35.86,50.52 35.86,49.3 37.13,48.03 37.13,46.31 36.51,45.68 35.23,45.68 34.24,44.7 34.24,44.58 34.16,44.5 J1.6
SENSOR_SDODA2M: length 23.7
  TOP w0.114: U2.46 24.93,53.46 24.84,53.56 24.57,53.56 24.24,53.22 v1(24.24,52.99)
  BOTTOM w0.114: J1.28 29.76,44.77 29.6,44.92 29.6,45.58 29.08,46.1 28.47,46.1 28.3,46.28 28.3,48.02 28,48.33 27.03,48.33 26.95,48.41 26.95,48.67 27.06,48.78 27.5,48.78 27.8,49.08 27.8,49.83 27.5,50.13 25.16,50.13 24.59,49.56 23.65,49.56 23.27,49.94 23.27,50.57 23.61,50.91 24.82,50.91 25.12,51.21 25.12,51.93 24.82,52.23 22.87,52.23 22.76,52.35 22.76,53.33 22.87,53.44 24.08,53.44 24.24,53.28 v1(24.24,52.99)
SENSOR_SDODA2P: length 23.6
  TOP w0.114: U2.45 25.02,54.11 24.78,53.87 24.31,53.87 v1(24.24,53.94)
  BOTTOM w0.114: v1(24.24,53.94) 24.06,53.76 22.74,53.76 22.44,53.46 22.44,52.22 22.74,51.92 24.68,51.92 24.8,51.8 24.8,51.35 24.68,51.23 23.48,51.23 22.95,50.7 22.95,49.81 23.52,49.24 24.72,49.24 25.29,49.81 27.37,49.81 27.48,49.7 27.48,49.21 27.37,49.1 26.93,49.1 26.63,48.8 26.63,48.27 26.9,48.01 27.86,48.01 27.98,47.89 27.98,46.15 28.34,45.79 28.95,45.79 29.29,45.45 29.29,44.79 29.36,44.72 J1.30
SENSOR_SDODB0M: length 24.5
  TOP w0.114: U2.17 34.4,55.41 34.62,55.2 34.87,55.2 35.2,54.87 35.2,54.62 35.57,54.24 35.57,47.66 32.19,44.29 26.18,44.29 25.79,44.68 25.79,45.2 25.33,45.66 24.51,45.66 v1(24.23,45.39)
  BOTTOM w0.114: v1(24.23,45.39) 24.47,45.15 24.47,44.6 24.56,44.51 J1.54
SENSOR_SDODB0P: length 24.6
  TOP w0.114: U2.16 33.78,54.76 34.11,55.1 34.27,55.1 35.26,54.11 35.26,47.8 32.06,44.6 26.31,44.6 26.11,44.81 26.11,45.33 25.46,45.98 24.59,45.98 v1(24.23,46.34)
  BOTTOM w0.114: v1(24.23,46.34) 24.79,45.78 24.79,44.73 24.96,44.56 J1.52
SENSOR_SDODB1M: length 23.4
  TOP w0.114: v1(26.45,46.54) 26.73,46.27 26.73,45.75 27.26,45.21 27.94,45.21 28.38,45.66 28.38,46.43 28.5,46.55 28.96,46.55 29.07,46.43 29.07,45.91 29.37,45.61 30.09,45.61 30.39,45.91 30.39,46.53 30.5,46.65 30.96,46.65 31.08,46.53 31.08,45.92 31.38,45.62 32.33,45.62 34.68,47.98 34.68,53.78 34.35,54.12 33.42,54.12 U2.15
  BOTTOM w0.114: v1(26.45,46.54) 26.66,46.34 26.66,45.97 27.24,45.39 27.24,45.02 26.96,44.73 J1.42
SENSOR_SDODB1P: length 23.3
  TOP w0.114: v1(27.41,46.54) 27.16,46.54 27.05,46.43 27.05,45.88 27.39,45.53 27.81,45.53 28.07,45.79 28.07,46.56 28.37,46.86 29.09,46.86 29.39,46.56 29.39,46.04 29.5,45.92 29.96,45.92 30.07,46.04 30.07,46.67 30.37,46.97 31.09,46.97 31.39,46.67 31.39,46.05 31.51,45.94 32.19,45.94 32.61,46.35 32.61,46.44 32.61,46.53 32.8,46.72 32.89,46.72 32.98,46.72 33.16,46.91 33.16,47 33.16,47.08 33.35,47.27 33.44,47.27 33.53,47.27 33.72,47.46 33.72,47.55 33.72,47.64 33.91,47.83 34,47.83 34.08,47.83 34.37,48.11 34.37,48.56 34.24,48.69 34.24,48.95 34.37,49.08 34.37,49.35 34.24,49.48 34.24,49.74 34.37,49.87 34.37,50.16 34.24,50.28 34.24,50.55 34.37,50.68 34.37,50.94 34.24,51.07 34.24,51.34 34.37,51.46 34.37,51.73 34.24,51.86 34.24,52.13 34.37,52.25 34.37,52.52 34.24,52.65 34.24,52.91 34.37,53.04 34.37,53.65 34.21,53.8 34.01,53.8 33.68,53.46 U2.14
  BOTTOM w0.114: v1(27.41,46.54) 27.16,46.54 26.97,46.36 26.97,46.1 27.56,45.52 27.56,44.88 27.36,44.68 J1.40
SENSOR_SDODB2M: length 24
  TOP w0.114: U2.9 30.62,52.39 30.45,52.22 30.45,51.46 31.52,50.4 31.52,48.95 30.78,48.21 28.27,48.21 27.3,49.18 25.81,49.18 24.9,50.09 24.9,51.07 24.68,51.3 24.16,51.3 23.93,51.07 23.93,49.11 23.36,48.54 22.68,48.54 v1(22.42,48.28)
  BOTTOM w0.114: v1(22.42,48.28) 22.74,48.6 22.93,48.6 23.37,48.16 23.37,47.3 22.67,46.6 22.67,45.28 23.38,44.57 23.38,44.48 23.31,44.42 J1.60
SENSOR_SDODB2P: length 24.1
  TOP w0.114: v1(22.42,49.24) 22.42,49.16 22.72,48.86 23.23,48.86 23.61,49.24 23.61,51.2 24.02,51.61 24.81,51.61 25.22,51.2 25.22,50.22 25.95,49.49 27.44,49.49 28.4,48.53 30.65,48.53 31.2,49.08 31.2,50.26 30.14,51.33 30.14,52.21 29.97,52.38 U2.8
  BOTTOM w0.114: v1(22.42,49.24) 22.74,48.92 23.06,48.92 23.69,48.29 23.69,47.16 22.99,46.47 22.99,45.41 23.69,44.7 23.69,44.56 23.76,44.49 J1.58
SENSOR_SDODCBM: length 23.4
  TOP w0.114: U2.11 31.92,52.39 31.75,52.23 31.75,51.78 31.91,51.63 33.13,51.63 33.54,51.21 33.54,50.31 33.24,50.01 32.56,50.01 32.45,49.9 32.45,49.44 32.56,49.33 33.24,49.33 33.54,49.03 33.54,48.43 32.48,47.37 27.77,47.37 27.11,48.03 24.62,48.03 v1(24.3,47.71)
  BOTTOM w0.114: J1.48 25.76,44.48 25.8,44.52 25.8,45.84 25.51,46.12 25.51,47.25 25.79,47.53 25.79,47.9 25.66,48.03 24.62,48.03 v1(24.3,47.71)
SENSOR_SDODCBP: length 23.4
  TOP w0.114: v1(24.3,48.67) 24.62,48.35 27.24,48.35 27.9,47.69 32.35,47.69 33.22,48.57 33.22,48.89 33.11,49.01 32.43,49.01 32.13,49.31 32.13,50.03 32.43,50.33 33.11,50.33 33.22,50.44 33.22,51.08 32.99,51.31 31.78,51.31 31.44,51.65 31.44,52.23 31.27,52.4 U2.10
  BOTTOM w0.114: v1(24.3,48.67) 24.62,48.35 25.79,48.35 26.11,48.03 26.11,47.4 25.83,47.12 25.83,46.25 26.12,45.97 26.12,44.49 26.16,44.45 J1.46
SPI0_CLK_I2C0_CLK: length 44
  TOP w0.152: v1(35.23,39.4) 35.23,39.45 34.7,39.98 34.7,42.01 33.05,43.66 24.43,43.66 22.73,45.37 22.73,47.02 21.84,47.91 21.84,51.72 23.06,52.94 23.06,58.02 24.46,59.41 24.46,61.95 24.77,62.26 27.3,62.26 v1(28.19,61.37) 28.67,60.89 U2.31
  BOTTOM w0.152: v1(28.19,61.37) 27.43,62.13 R7.2 ; J1.5 34.16,40.47 v1(35.23,39.4)
SPI0_CS: length 42.4
  TOP w0.152: v1(33.4,39.27) 33.68,39.55 33.68,41.3 32.05,42.93 23.93,42.93 22.63,44.22 20.95,44.22 20.07,45.11 20.07,52.22 22.33,54.48 22.33,58.45 23.7,59.82 23.7,63.91 24.79,65 v1(24.79,65.3)
  BOTTOM w0.152: R12.2 v1(24.79,65.3) ; J1.9 33.36,40.4 33.6,40.16 33.6,39.47 v1(33.4,39.27)
SPI0_MOSI_I2C0_DAT: length 45.5
  TOP w0.152: v1(34.29,39.35) 34.11,39.52 34.11,41.91 32.72,43.31 24.16,43.31 22.1,45.37 22.1,46.64 21.34,47.4 21.34,52.35 22.68,53.7 22.68,58.22 24.08,59.62 24.08,62.21 24.64,62.76 27.81,62.76 v1(29.21,61.37) 29.32,61.26 U2.30
  BOTTOM w0.152: v1(29.21,61.37) 28.7,61.88 R6.2 ; v1(34.29,39.35) 34.29,39.9 33.76,40.44 J1.7
VI_POWER1: length 15.6
  TOP w0.305: v1(22.35,42.65) 23.22,41.78 29.69,41.78 30.68,40.79 30.68,39.65 v1(30.4,39.37)
  BOTTOM w0.152: v1(30.4,39.37) 30.96,39.93 J1.21
  BOTTOM w0.305: v1(22.35,42.65) 22.35,43.49 21.29,44.55 R4.1
VI_POWER2: length 14.3
  TOP w0.305: v1(22.4,41.56) 22.63,41.33 29.36,41.33 30.1,40.59 30.1,39.93 v1(29.57,39.4)
  BOTTOM w0.152: v1(29.57,39.4) 30.56,40.39 J1.23
  BOTTOM w0.305: R5.1 20.7,43.46 22.4,41.76 v1(22.4,41.56)
$4N2: length 4.2
  BOTTOM w0.508: R2.2 C3.2 ; C3.2 R3.1 ; C3.2 17.3,52.38 17.41,52.26 U1.5
$4N4: length 1.3
  BOTTOM w0.508: C7.1 15.12,51.32 U1.4
$4N17: length 3.3
  BOTTOM w0.381: U1.3 16.46,47.86 16.05,47.45 C6.1 R1.2
$4N179: length 1.1
  BOTTOM w0.254: U3.8 41.14,48.28 R11.2
$4N192: length 5
  BOTTOM w0.203: 39.12,49.23 39.5,49.61 U3.2
  BOTTOM w0.381: 39.12,49.23 39.12,48.79 38.73,48.41 R13.1 38.23,49.61 C26.2 38.13,49.76 R14.2
$5N29: length 6.6
  TOP w0.152: U2.32 28.02,60.4 v1(27.05,61.37)
  BOTTOM w0.152: R10.1 R12.1 R9.2 26.13,62.29 v1(27.05,61.37)
$5N128: length 3.4
  TOP w0.152: v1(30.48,62.03) 31.27,61.24 U2.27
  BOTTOM w0.152: C39.1 30.35,62.16 v1(30.48,62.03)
$5N130: length 3.5
  TOP w0.152: U2.25 32.57,60.92 v1(33.27,61.62)
  BOTTOM w0.152: C40.1 32.89,62.38 33.27,62 v1(33.27,61.62)
$5N132: length 3
  TOP w0.114: U2.26 31.92,61.45 31.89,61.48
  TOP w0.152: 31.89,61.48 v1(31.62,61.75)
  BOTTOM w0.152: C28.1 v1(31.62,61.75)
$5N134: length 2.1
  TOP w0.152: v1(30.45,61.29) 30.62,61.13 U2.28
  BOTTOM w0.152: C27.1 30.35,61.19 v1(30.45,61.29)
$7N8: length 6.2
  BOTTOM w0.305: R2390.2 17.42,70.46 17.14,70.18 C2404.2 ; C2404.2 18.33,69.18 R2381.1 ; C2404.2 16.61,69.18 Q2018.1
$7N9: length 5.8
  BOTTOM w0.305: R2380.1 23.5,70.92 C2405.2 ; R2389.2 24.8,69.31 C2405.2 ; C2405.2 23.09,69.31 Q2019.1
$7N33: length 10.8
  BOTTOM w0.305: Q2019.3 20.96,66.83 20.32,66.19 Q2014.3 ; Q2019.3 20.96,70.99 20.42,71.53 R2375.1 ; Q2019.3 20.91,70.11 20.27,70.11 19.69,69.52 19.69,69.19 19.08,68.58 R2381.2
$7N37: length 1.6
  BOTTOM w0.305: Q2013.1 17.73,62.94 R2385.2
$7N49: length 1.9
  BOTTOM w0.305: R2386.2 20.55,62.36 Q2014.1

## Copper pours and planes (outline as drawn; the poured copper is in the pictures)
3V3 on BOTTOM (solid shape): 46.48,63.02 46.48,59.59 46.36,59.46 45.08,59.46 44.96,59.59 44.96,63.02 45.08,63.15 46.36,63.15
3V3 on BOTTOM (solid shape): 18.82,49.48 18.82,48.54 18.95,48.41 20.09,48.41 20.7,47.8 21.91,47.8 22.03,47.68 22.03,45.17 21.89,45.03 18.49,45.03 18.47,45.05 18.1,45.05 18.08,45.03 17.88,45.03 17.81,45.1 17.81,47.45 17.93,47.57 19.82,47.57 19.82,48.09 19.32,48.09 19.32,47.57 17.93,47.57 18.03,47.68 18.03,49.58 18.72,49.58
3V3 on BOTTOM (solid shape): 15.75,60.35 15.75,58.7 15.62,58.57 11.94,58.57 11.68,58.83 11.68,58.95 15.11,58.95 15.11,59.34 14.73,59.34 14.73,58.95 14.48,58.95 14.48,59.34 14.1,59.34 14.1,58.95 11.68,58.95 11.68,59.84 11.94,60.1 12.83,60.1 12.89,60.16 12.92,60.17 12.99,60.2 13.06,60.23 13.12,60.27 13.18,60.32 13.23,60.38 13.27,60.44 13.31,60.5 13.34,60.57 13.36,60.61 15.49,60.61
3V3 on BOTTOM (solid shape): 24.27,41.29 24.27,40.16 24.26,40.12 24.26,40.06 24.26,39.99 24.27,39.96 24.27,39 24.17,38.91 15.81,38.91 15.6,39.12 15.6,40.01 21.08,40.01 21.08,40.39 20.78,40.39 20.78,40.01 20.52,40.01 20.52,40.39 20.22,40.39 20.22,40.01 15.6,40.01 15.6,40.87 15.77,41.05 19.05,41.05 19.3,40.79 22.2,40.79 22.35,40.64 23.19,40.64 23.24,40.69 23.24,41.33 23.3,41.39 24.17,41.39
3V3 on BOTTOM (solid shape): 47.04,51.89 47.04,48.77 46.94,48.67 43.24,48.67 43.06,48.48 41.92,48.48 41.82,48.59 41.82,48.85 42.99,48.85 42.99,49.2 42.68,49.2 42.68,48.85 41.82,48.85 41.82,48.88 42.44,48.88 42.44,49.19 42.17,49.19 42.17,48.88 41.82,48.88 41.82,49.4 41.74,49.48 40.76,49.48 40.75,49.49 40.75,49.75 41.79,49.75 41.79,49.75 44.86,49.75 44.97,49.86 44.97,51.87 45.02,51.92 47.02,51.92
3V3 on BOTTOM (solid shape): outline of 84 points within 11.38,47.86 15.93,51.84
3V3 on POWER03 (solid shape): outline of 5096 points within 11.68,38.51 46.64,74.96
AGND on TOP (solid shape): 43.81,64.67 43.81,59.59 43.18,58.95 38.1,58.95 37.59,58.45 35.05,58.45 34.8,58.7 34.8,59.21 34.67,59.34 34.29,59.34 34.16,59.46 34.16,60.35 33.91,60.61 33.15,60.61 33.02,60.73 33.02,60.85 33.38,61.2 33.39,61.2 33.57,61.31 33.69,61.49 33.55,61.95 33.07,62 32.89,62 30.29,64.61 30.29,66.77 30.61,67.08 41.4,67.08
AGND on BOTTOM (solid shape): 43.94,60.22 43.94,58.95 43.81,58.83 42.16,58.83 42.04,58.95 42.04,59.59 42.8,60.35 43.81,60.35
AGND on BOTTOM (solid shape): 41.91,66.7 41.91,64.29 41.78,64.16 34.54,64.16 33.66,65.05 30.35,65.05 30.35,66.96 30.48,67.08 41.53,67.08
AGND on GND02 (solid shape): outline of 247 points within 24.75,58.04 43.81,67.08
AGND on POWER03 (solid shape): outline of 263 points within 24.75,58.04 43.81,67.08
GND on TOP (solid shape): outline of 991 points within 10.79,38.76 47.31,75.46
GND on BOTTOM (solid shape): 16,58.19 16,56.8 15.49,56.29 13.46,56.29 12.95,56.8 12.95,57.56 15.11,57.56 15.11,57.94 14.73,57.94 14.73,57.56 14.48,57.56 14.48,57.94 14.1,57.94 14.1,57.56 12.95,57.56 12.95,57.94 13.34,58.32 15.88,58.32
GND on BOTTOM (solid shape): 22.59,51.63 22.59,50.18 21.84,49.43 21.84,48.65 21.64,48.44 20.59,48.44 20.34,48.69 19.52,48.69 19.47,48.74 19.47,48.97 20.3,48.97 20.3,49.49 19.83,49.49 19.83,48.97 19.47,48.97 19.47,50.94 21.97,50.94 21.97,51.41 21.47,51.41 21.47,50.94 19.47,50.94 19.47,51.11 19.52,51.16 20.57,51.16 21.13,51.72 22.5,51.72
GND on BOTTOM (solid shape): 38.62,53.44 39.23,52.83 40.05,52.83 40.28,52.61 42.16,52.61 42.2,52.57 42.2,51.11 41.58,50.49 40.75,50.49 40.75,51.13 40.67,51.21 39.43,51.21 38.74,51.9 38.42,51.9 37.77,52.56 37.77,52.7 38.38,52.7 38.38,53.1 37.98,53.1 37.98,52.7 37.77,52.7 37.77,53.39 37.82,53.45 38.62,53.45
GND on BOTTOM (solid shape): 43.44,48.01 46.91,48.01 47.14,47.78 47.14,47.42 47.14,47.42 47.14,39.3 46.74,38.89 44.7,38.89 44.58,39.02 41.05,39.02 41.05,39.03 36.92,39.03 36.7,39.24 36.7,44.1 38.73,46.13 40.23,46.13 40.87,46.76 40.87,47.38 40.94,47.45 41.66,47.45 41.74,47.53 42.99,47.53 42.99,47.88 42.69,47.88 42.69,47.53 41.74,47.53 41.74,47.54 42.45,47.54 42.45,47.89 42.15,47.89 42.15,47.54 41.74,47.54 41.77,47.57 41.77,48.2 43.25,48.2
GND on BOTTOM (solid shape): 13.28,47.5 14.12,47.5 14.48,47.14 15.14,47.14 15.6,46.69 15.6,46.46 15.75,46.31 16.36,46.31 16.41,46.25 16.41,44.63 17.73,43.31 18.52,43.31 18.81,43.02 19.95,43.02 20.66,43.02 21.7,41.97 21.7,41.19 21.59,41.07 19.81,41.07 19.48,41.4 15.77,41.4 15.14,40.77 15.14,39.17 14.99,39.02 13.21,39.02 13.15,39.02 13.03,39.02 12.97,39.03 11.23,39.03 11.18,39.03 11.18,46.32 11.18,46.32 11.18,47.29 12.44,47.29 12.44,47.68 12,47.68 12,47.29 11.18,47.29 11.18,47.97 11.25,48.04 12.74,48.04
GND on BOTTOM (solid shape): outline of 226 points within 10.89,52.48 47.32,75.46
GND on GND02 (solid shape): outline of 4744 points within 10.92,38.63 47.37,75.46
GND on POWER03 (solid shape): 45.48,75.46 45.99,75.33 46.46,75.1 47.12,74.45 47.12,62.13 46.86,61.88 45.21,61.88 44.96,62.13 44.96,64.92 42.29,67.59 30.48,67.59 30.35,67.72 30.35,72 30.41,72.06 30.49,72.1 30.57,72.06 31.34,71.83 31.8,72.48 31.8,72.86 31.34,73.51 30.57,73.28 30.49,73.24 30.41,73.28 30.35,73.34 30.35,74.83 30.99,75.46
GND on POWER03 (solid shape): outline of 922 points within 21.84,43.08 37.72,57.94
+1_2V_VDD12 on BOTTOM (solid shape): outline of 143 points within 26.01,50.19 44.72,56.54
+1_8V_VDD18 on BOTTOM (solid shape): 23.65,56.67 25.78,56.67 25.84,56.61 25.84,56.39 25.58,56.14 23.83,56.14 23.83,56.12 23.75,56.03 22.99,56.03 22.07,55.12 22.07,52.21 21.87,52.01 20.64,52.01 20.38,51.75 19.42,51.75 19.13,51.45 19.13,50.76 18.97,50.61 18.03,50.61 18.03,52.02 18.34,52.33 18.52,52.33 18.6,52.41 21.95,52.41 21.95,52.77 21.51,52.77 21.51,52.41 18.6,52.41 18.6,52.41 21.25,52.41 21.25,52.78 20.86,52.78 20.86,52.41 18.6,52.41 19.18,52.99 19.18,54.64 20.84,56.3 24.24,56.3 24.24,56.32 25.34,56.32 25.34,56.5 24.97,56.5 24.97,56.32 24.24,56.32 24.24,56.48 23.9,56.48 23.9,56.3 20.84,56.3 21.74,57.2 23.12,57.2
+3_3V_AVDD on BOTTOM (solid shape): 43.81,63.02 43.81,60.73 43.69,60.61 42.67,60.61 41.4,59.34 36.32,59.34 35.56,58.57 34.04,58.57 33.91,58.7 33.91,59.21 34.14,59.44 34.17,59.43 34.22,59.42 34.28,59.41 34.34,59.41 34.4,59.43 34.46,59.44 34.49,59.46 34.67,59.46 34.8,59.59 34.8,60.1 35.69,60.1 35.69,60.48 35.18,60.48 35.18,60.1 34.8,60.1 34.8,60.73 35.69,60.73 35.69,61.11 35.18,61.11 35.18,60.73 34.8,60.73 34.8,61.37 34.54,61.62 34.54,63.02 34.67,63.15 43.69,63.15
$4N187 on BOTTOM (solid shape): 44.54,50.05 44.47,49.98 40.76,49.98 40.76,50.23 40.77,50.24 41.75,50.24 42.45,50.94 42.45,52.2 42.55,52.29 44.54,52.29

Small or netless copper shapes (teardrops, artwork), in the pictures only: 6 on TOP

## Text on the board
BOTTOM: MN34220_LV_REFB VER.A ARTWORK BOTTOM
Ref Des/Silkscreen Bottom: A | MN34220_LV_REFB VER.A SILKSCREEN BOTTOM
User.Comments: A | B | C | D | E | F | G | H | 8 | 7 | 6 | 5 | 4 | 3 | 2 | 1 | 39 | 40 | MN34220_LV_REFB VER.A SOLDMASK TOP | MN34220_LV_REFB VER.A SOLDMASK BOTTOM
TOP: MN34220_LV_REFB VER.A ARTWORK TOP
Ref Des/Silkscreen Top: MN34220_LV_REFB VER.A | MN34220_LV_REFB VER.A SILKSCREEN TOP
GND02: MN34220_LV_REFB VER.A ARTWORK LAYER02
POWER03: MN34220_LV_REFB VER.A ARTWORK LAYER03
DIMENSION: V_CUT | MN34220_LV_REFB VER.A | 1--Gerber TOP | 2--GROUND PLANE02 | 3--POWER PLANE03 | 4--Gerber BOTTOM | MN34220_LV_REFB VER.A DRILL CHART
DISPLAY_BOTTOM: MN34220_LV_REFB VER.A PASTEMASK BOTTOM
DISPLAY_TOP: MN34220_LV_REFB VER.A PASTEMASK TOP
PLACE_BOUND_BOTTOM: FIGURE | SIZE | 8.0 | 10.0 | 20.0 | 79.0 | 87.0 | DRILL CHART: TOP to BOTTOM | ALL UNITS ARE IN MILS | PLATED | QTY | 16 | 214 | 10 | 12 | 4
